# Altium PCB PCB1.PcbDoc
Units mm, origin at the board's own origin, x right, y up, seen from the top; angles counter-clockwise.
Board outline 25 x 65 mm, 2 copper layers (Top Layer, Bottom Layer); 15 components, 30 nets, 94 pads, 8 vias.
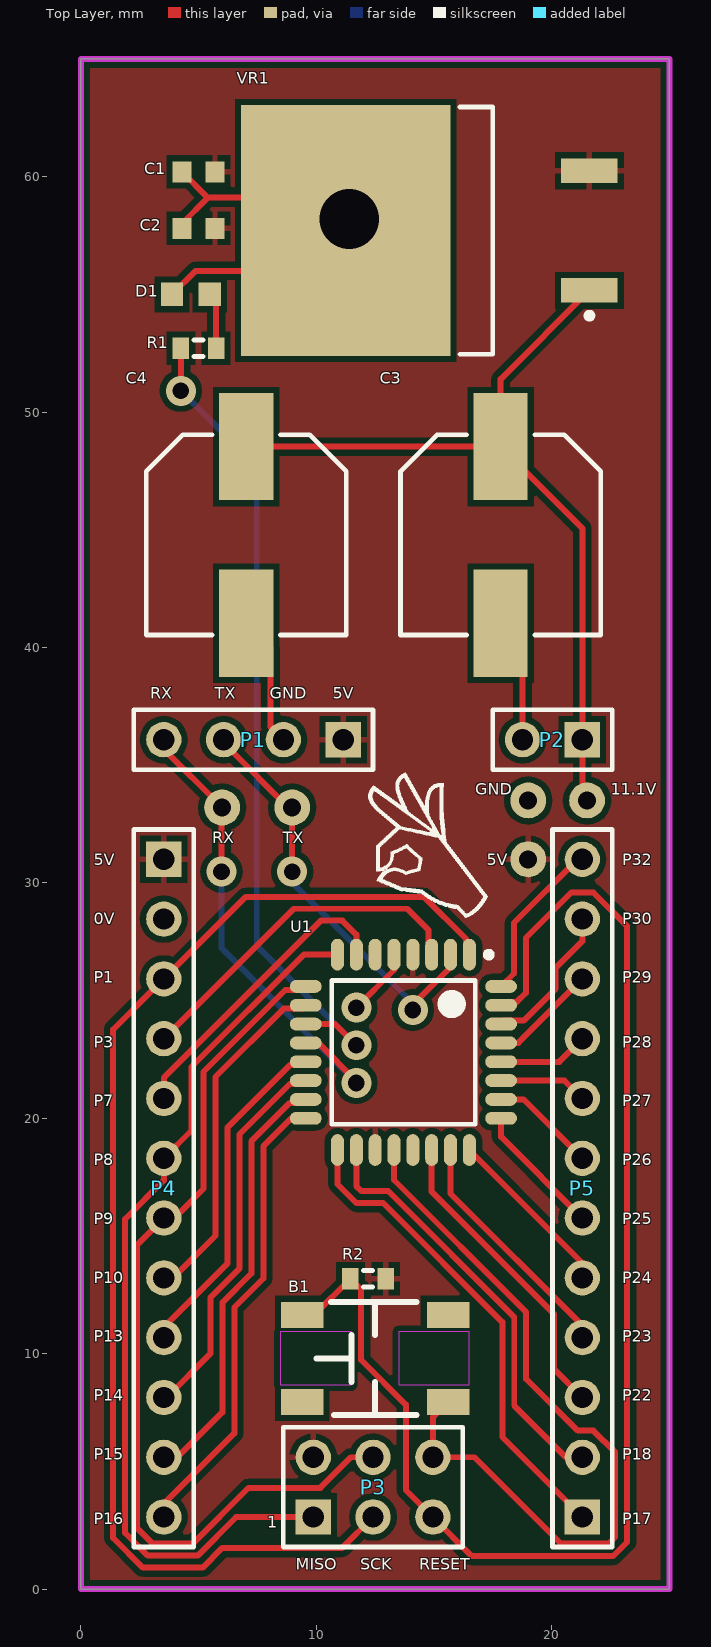
[diagram p0: Top Layer view]
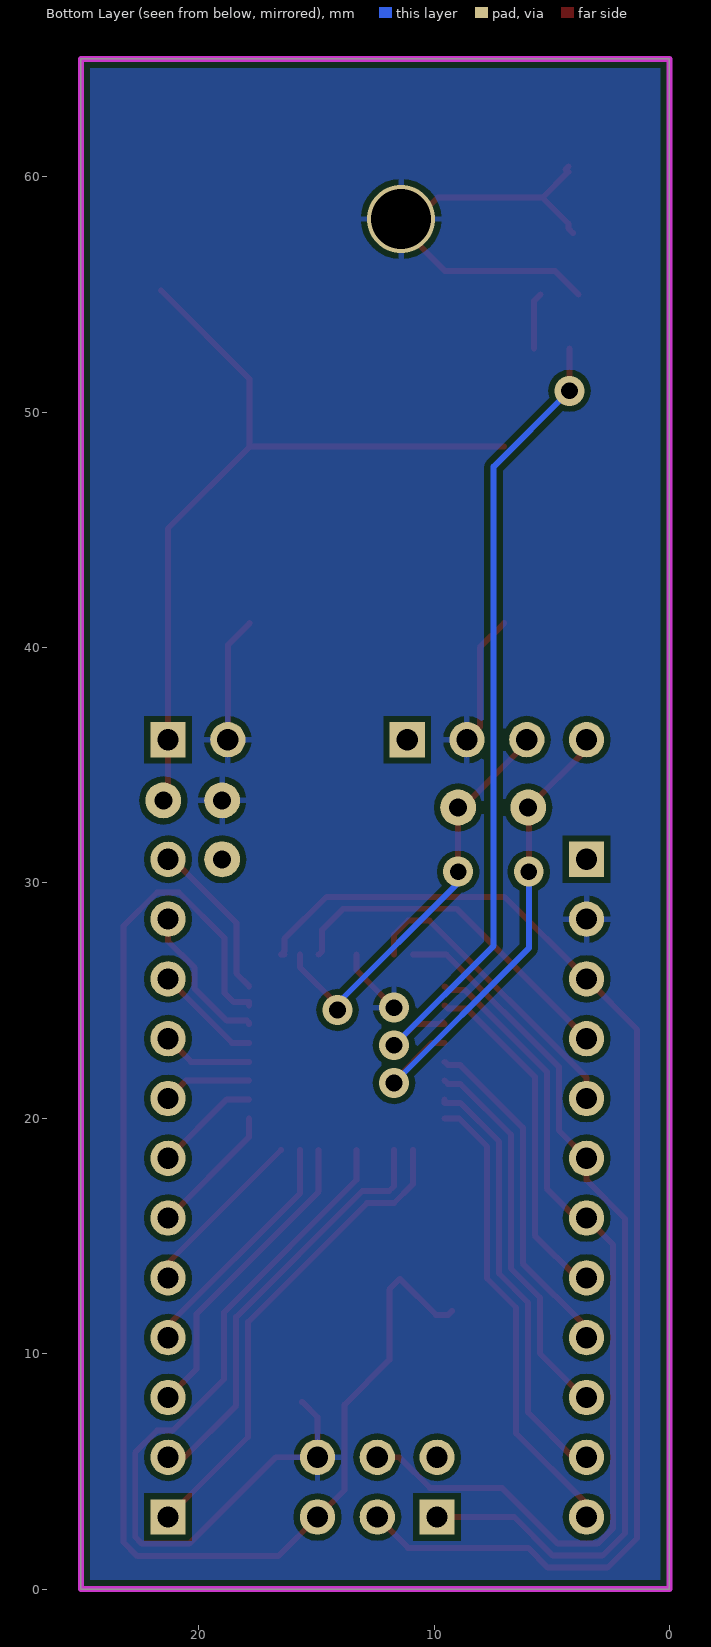
[diagram p1: Bottom Layer view, seen from below]

## Layer stack, top to bottom
Top Solder: solder mask 0.0102, Solder Resist, Dk 3.5
Top Layer: signal copper 0.0356
Dielectric 1: dielectric 0.32, FR-4, Dk 4.8
Bottom Layer: signal copper 0.0356
Bottom Solder: solder mask 0.0102, Solder Resist, Dk 3.5

## Board outline
0,0 0,65 25,65 25,0

## Design rules (kind name [scope] priority, off if disabled: settings)
Clearance [All] p1: gap=0.254
PolygonConnect [All] p1: connectstyle=Relief reliefconductorwidth=0.254 reliefentries=4 polygonreliefangle="90 Angle" airgapwidth=0.254
RoomDefinition Sheet3 [InComponentClass('Sheet3')] p1: confinementstyle=ConfineIn formatcopy=TRUE lockcomponents=FALSE outline 0,0 25,0 25,65 0,65
RoutingVias [All] p1: holewidth=0.711 width=1.27 viastyle="Through Hole" minholewidth=0.711 minwidth=1.27 maxholewidth=0.711 maxwidth=1.27
SolderMaskExpansion [All] p1: expansion=0.102
Width [All] p1: maxlimit=0.254 minlimit=0.254 preferedwidth=0.254
30 further rules are at their usual default settings.

## Classes and differential pairs
component class Sheet3: B1 C1 C2 C3 C4 D1 P2 P3 P4 P5 P? R1 R2 VR1

## Components (designator, comment, footprint, x,y, rotation, side; value= is the part's Value field where it differs from the comment)
B1 "Button" "SMT Tactile Button" 12.5,9.8 r180 top
C1 "Cap" 1608[0603] 4.996,60.2 r0 top
C2 "Cap" 1608[0603] 4.996,57.8 r0 top
C3 "Cap Pol2" CAPAE9983X105M 17.829,44.779 r270 top
C4 "Cap Pol2" CAPAE9983X105M 7.025,44.779 r270 top
D1 "LED1" L0603 4.671,55 r180 top
P1 "Header 4" HDR1X4 11.14,36.08 r180 top
P2 "Header 2" HDR1X2 21.3,36.08 r180 top
P3 "Header 3X2" HDR2X3 9.87,3.06 r0 top
P4 "Header 12" HDR1X12 3.52,31 r270 top
P5 "Header 12" HDR1X12 21.3,3.06 r90 top
R1 "Res3" J1-0603 4.996,52.709 r180 top
R2 "Res3" J1-0603 12.2,13.181 r0 top
U1 "ATmega32M1-AU" 32A_L 13.7,22.8 r270 top
VR1 "Volt Reg" D2PAK_N 14.8,57.709 r180 top

## Footprints (in the part's own frame and the unit in brackets; to place one, negate y for a bottom-side part, rotate by r counter-clockwise, add the part's x,y. Pads: shape width x height; smd on the part's side, far side on the other; paste and mask are expansions set on the pad)
32A_L [mm] "Thin QFP, 32-Leads, Body 7x7mm, Pitch 0.8mm, IPC High Density"
  oval 1.35x0.55 smd: 1(-4.15,2.8) 2(-4.15,2) 3(-4.15,1.2) 4(-4.15,0.4) 5(-4.15,-0.4) 6(-4.15,-1.2) 7(-4.15,-2) 8(-4.15,-2.8) 17(4.15,-2.8) 18(4.15,-2) 19(4.15,-1.2) 20(4.15,-0.4) 21(4.15,0.4) 22(4.15,1.2) 23(4.15,2) 24(4.15,2.8)
  oval 0.55x1.35 smd: 9(-2.8,-4.15) 10(-2,-4.15) 11(-1.2,-4.15) 12(-0.4,-4.15) 13(0.4,-4.15) 14(1.2,-4.15) 15(2,-4.15) 16(2.8,-4.15) 25(2.8,4.15) 26(2,4.15) 27(1.2,4.15) 28(0.4,4.15) 29(-0.4,4.15) 30(-1.2,4.15) 31(-2,4.15) 32(-2.8,4.15)
  silkscreen extent -4.27,-3.05 3.05,3.75, body extent -3.5,-3.5 3.5,3.5, height 1.2
1608[0603] [mm] "Chip Capacitor, Body 1.6x0.8mm, IPC High Density"
  rect 0.8x0.9 smd: 1(-0.7,0) 2(0.7,0)
  body extent -0.87,-0.48 0.87,0.48, height 1.3
CAPAE9983X105M [mm] "Aluminum Electrolytic Capacitor, Body 8.30x8.30x10.50mm, IPC Low Density"
  rect 4.55x2.3 smd: 1(-3.75,0) 2(3.75,0)
  silkscreen extent -4.25,-4.25 4.25,4.25, body extent -4.25,-4.25 4.25,4.25, height 10.5
D2PAK_N [mm] "D2-PAK, 4-Leads, Body 8.8x10.4mm, Pitch 2.54mm, Lead Span 15.1mm, IPC Medium Density"
  rect 2.4x1.05 smd: 1(-6.8,2.54) 3(-6.8,-2.54)
  rect 8.9x10.65 smd: 2(3.55,0)
  silkscreen extent -6.93,-5.25 -1.3,5.25, body extent -2.7,-5.28 6.3,5.28, height 4.69
HDR1X2 [mm] "Connector; Header; 2 Position"
  rect 1.5x1.5 hole 0.9: 1(0,0)
  round 1.5 hole 0.9: 2(2.54,0)
  silkscreen extent -1.27,-1.27 3.81,1.27
HDR1X4 [mm] "Connector; Header; 4 Position"
  rect 1.5x1.5 hole 0.9: 1(0,0)
  round 1.5 hole 0.9: 2(2.54,0) 3(5.08,0) 4(7.62,0)
  silkscreen extent -1.27,-1.27 8.89,1.27
HDR1X12 [mm] "Connector; Header; 12 Position"
  rect 1.5x1.5 hole 0.9: 1(0,0)
  round 1.5 hole 0.9: 2(2.54,0) 3(5.08,0) 4(7.62,0) 5(10.16,0) 6(12.7,0) 7(15.24,0) 8(17.78,0) 9(20.32,0) 10(22.86,0) 11(25.4,0) 12(27.94,0)
  silkscreen extent -1.27,-1.27 29.21,1.27
HDR2X3 [mm] "Connector; Header; 3x2 Position"
  rect 1.5x1.5 hole 0.9: 1(0,0)
  round 1.5 hole 0.9: 2(0,2.54) 3(2.54,0) 4(2.54,2.54) 5(5.08,0) 6(5.08,2.54)
  silkscreen extent -1.27,-1.27 6.35,3.81
J1-0603 [mm] "Chip Resistor, Body 1.6x0.8mm, IPC High Density"
  rect 0.7x0.9 smd: 1(-0.75,0) 2(0.75,0)
  silkscreen extent -0.2,-0.35 0.2,0.35, body extent -0.85,-0.48 0.85,0.48, height 0.9
L0603 [mm]
  rect 0.95x1 smd: 1(-0.8,0) 2(0.8,0)
"SMT Tactile Button" [mm]
  rect 1.8x1.1 smd: 1(3.1,1.85) 2(-3.1,1.85) 3(-3.1,-1.85) 4(3.1,-1.85)
  Top Layer keep-out region: 1.025,-1.125 4.025,-1.125 4.025,1.125 1.025,1.125
  Top Layer keep-out region: -4,-1.125 -1,-1.125 -1,1.125 -4,1.125
  silkscreen extent -1.75,-2.4 2.5,2.4

## Part data
B1: library part Switch
C1 C2: "Capacitor"
C3 C4: "Polarized Capacitor (Axial)"
D1: "Typical RED GaAs LED"
P1: "Header, 4-Pin"
P2: "Header, 2-Pin"
P3: "Header, 3-Pin, Dual row"
P4 P5: "Header, 12-Pin"
R1 R2: "Resistor"
U1: "8-bit AVR Microcontroller, 2.7-5.5V, 16MHz, 32KB Flash, 1KB EEPROM, 2KB SRAM, Industrial Grade (-40° to +85°C), 32-Pin TQFP"
VR1: "Voltage Regulator"

## Free pads (board coordinates)
  round 1.524 hole 0.762: 2(19,33.5) 3(19,31) 4(21.5,33.5) 5(6,33.2) 6(8.975,33.2)

## Via types
v1: diameter 1.27, hole 0.711, Top Layer to Bottom Layer, 7 vias
v2: diameter 2.896, hole 2.54, Top Layer to Bottom Layer, 1 vias

## Nets (pads, with @x,y where several pads share a name; then routed paths per layer and width w, separated by ;. In a path a pad name is that pad's centre, name@x,y a point inside that pad or via, vN(x,y) a via of type N, cw(c..) or ccw(c..) an arc to the next point about the centre after c; other vN are vias at no path point)
3S(11.1V): C3.1 C4.1 P2.1 pad.4 VR1.1 | length 35.7
  Top Layer w0.254: C4.1 C3.1 ; pad.4 21.3,33.45 P2.1 21.3,45.059 C3.1 ; VR1.1 17.829,51.398 C3.1
5V: C1.2 C2.2 P1.1 P3.2 P4.1 pad.3 R2.2 U1.4 U1.19 VR1.3
GND: B1.2 C1.1 C2.1 C3.2 C4.2 D1.2 P1.2 P2.2 P3.6 P4.2 pad.2 U1.5 U1.20 VR1.2 | length 65.2
  Top Layer w0.254: D1.2 4.871,56 9.541,56 VR1.2 9.854,59.104 5.391,59.104 ; C2.1@4.1,57.604 C2.1 4.296,58.008 5.391,59.104 ; C1.1 5.391,59.104 ; C1.1@4.296,60.421 C1.1@4.406,60.311 ; C4.2 8.05,40.004 8.05,36.63 P1.2 ; v1(11.7,24.7) 13.3,26.3 U1.5 ; U1.20 13.3,17.376 18.916,11.76 18.916,8.925 21.11,6.731 21.768,6.731 22.692,5.807 22.692,2.21 22.411,1.929 20.392,1.929 16.721,5.6 P3.6 14.95,7.3 B1.2 ; C3.2 18.76,40.098 P2.2
  other v2: 11.4,58.2
MISO: P3.1 P4.6 U1.8 | length 38.2
  Top Layer w0.254: P3.1 6.597,3.06 4.958,1.421 2.841,1.421 1.881,2.381 1.881,15.72 3.52,17.359 P4.6 4.7,19.48 4.7,22.182 9.468,26.95 U1.8
MOSI: P3.4 P4.7 U1.9 | length 38.5
  Top Layer w0.254: U1.9 9.406,25.456 8.693,25.456 5.208,21.971 5.208,17.008 3.96,15.76 P4.7 2.389,14.629 2.389,2.592 3.052,1.929 4.747,1.929 7.118,4.3 10.169,4.3 11.469,5.6 P3.4
NetD1_1: D1.1 R1.1 | length 2.4
  Top Layer w0.254: D1.1 5.746,54.725 R1.1
P1: P3.3 P4.3 U1.1 | length 53
  Top Layer w0.254: P3.3 11.1,1.75 6.005,1.75 5.168,0.913 2.631,0.913 1.373,2.171 1.373,23.773 P4.3 7.008,29.408 14.57,29.408 16.356,27.622 16.356,27.094 U1.1 U1.1@16.356,26.95
P3: P4.4 U1.3 | length 15
  Top Layer w0.254: P4.4 9.04,28.9 13.862,28.9 14.756,28.006 14.756,27.094 U1.3
P7: P4.5 U1.7 | length 12.9
  Top Layer w0.254: P4.5 3.52,21.72 10.192,28.392 11.108,28.392 11.7,27.8 U1.7
P10: P4.8 U1.10 | length 14.8
  Top Layer w0.254: P4.8 3.92,13.22 5.716,15.016 5.716,21.761 8.611,24.656 9.406,24.656 U1.10
P13: P4.9 U1.13 | length 14.5
  Top Layer w0.254: P4.9 3.52,11.12 6.224,13.824 6.224,19.602 8.878,22.256 9.406,22.256 U1.13
P14: P4.10 U1.14 | length 16.3
  Top Layer w0.254: P4.10 3.64,8.14 5.5,10 5.5,12.382 6.732,13.614 6.732,19.31 8.878,21.456 9.406,21.456 U1.14
P15: P4.11 U1.15 | length 18.4
  Top Layer w0.254: P4.11 4.1,5.6 6.008,7.508 6.008,12.171 7.24,13.403 7.24,19.018 8.878,20.656 9.55,20.656 U1.15
P16: P4.12 U1.16 | length 19.8
  Top Layer w0.254: P4.12 3.52,3.62 6.516,6.616 6.516,11.961 7.748,13.193 7.748,18.807 8.941,20 U1.16
P17: P5.1 U1.17 | length 20.6
  Top Layer w0.254: U1.17 10.9,17.2 11.7,16.4 12.839,16.4 17.9,11.339 17.9,6.46 P5.1
P18: P5.2 U1.18 | length 18.1
  Top Layer w0.254: U1.18 11.7,17.118 11.91,16.908 13.049,16.908 18.408,11.549 18.408,7.792 20.6,5.6 P5.2
P22: P5.3 U1.22 | length 13.2
  Top Layer w0.254: U1.22 14.9,16.882 20.1,11.682 20.1,9.34 P5.3
P23: P5.4 U1.23 | length 10.8
  Top Layer w0.254: U1.23 15.7,16.8 21.3,11.2 P5.4 P5.4@20.775,10.68
P24: P5.5 U1.24 | length 7.8
  Top Layer w0.254: U1.24 21.3,13.85 P5.5 P5.5@20.93,13.22
P25: P5.6 U1.25 | length 5.7
  Top Layer w0.254: U1.25 17.85,19.21 P5.6
P26: P5.7 U1.26 | length 4.5
  Top Layer w0.254: U1.26 18.8,20.8 P5.7
P27: P5.8 U1.27 | length 3.8
  Top Layer w0.254: U1.27 20.54,21.6 P5.8
P28: P5.9 U1.28 | length 3.9
  Top Layer w0.254: U1.28 20.32,22.4 P5.9
P29: P5.10 U1.29 | length 4.6
  Top Layer w0.254: U1.29 18.58,23.2 P5.10
P30: P5.11 U1.30 | length 6.4
  Top Layer w0.254: U1.30 17.85,24.05 17.944,24.144 18.806,24.144 20.169,25.507 20.169,26.388 21.3,27.519 P5.11
P32: P5.12 U1.32 | length 6.9
  Top Layer w0.254: U1.32 18.398,26.148 18.398,28.298 21.1,31 P5.12
PULSE: R1.2 U1.11 | length 35.4
  Top Layer w0.254: v1(4.246,50.9) R1.2 ; U1.11@9.65,24.1 U1.11 10.8,24 v1(11.7,23.1)
  Bottom Layer w0.254: v1(4.246,50.9) 7.469,47.677 7.469,27.331 v1(11.7,23.1)
RESET: B1.4 P3.5 R2.1 U1.31 | length 59.2
  Top Layer w0.254: B1.4@9.244,11.806 B1.4 9.919,11.65 R2.1 11.9,12.731 11.9,9.736 13.8,7.836 13.8,4.21 P3.5 16.61,1.4 22.6,1.4 23.2,2 23.2,28.159 21.768,29.591 20.832,29.591 18.906,27.665 18.906,25.328 18.522,24.944 17.85,24.944 U1.31
RXD: P1.4 pad.5 U1.12 | length 21.4
  Top Layer w0.254: P1.4 3.52,35.68 pad.5 5.975,33.175 v1(5.975,30.475) v1@5.975,29.95 ; U1.12 10.078,23.2 11.7,21.578 v1(11.7,21.5)
  Bottom Layer w0.254: v1(5.975,30.475) 5.975,27.225 v1(11.7,21.5)
TXD: P1.3 pad.6 U1.2 | length 17.8
  Top Layer w0.254: P1.3 6.06,35.94 8.975,33.025 v1(8.975,30.475) ; v1(14.1,24.6) 14.1,24.822 15.7,26.422 U1.2
  Bottom Layer w0.254: v1(8.975,30.475) 8.975,30 14.1,24.875 v1(14.1,24.6)
pads on no net: B1.1 B1.3 U1.6 U1.21

## Polygon pours and split planes (outlines as drawn)
5V on Top Layer "5V_L01_P000" (solid, remove dead copper, pour order 0): -3.8,69 -7.2,65.6 -7.2,-1.1 29.7,-1.1 30.8,0 30.9,0.1 30.9,70.4
GND on Bottom Layer "GND_L02_P002" (solid, remove dead copper, pour order 2): -4.7,72.3 -6.4,70.6 -6.4,-1.3 39.1,-1.3 41.3,-3.5 35.5,2.3 35.5,71.5

## Keep-outs
Keep-Out Layer:
  the board outline again, w0.254

## Silkscreen, mask and mechanical layers (free items; w line width, h text height)
Top Overlay:
  region: 1507 vertices and 6 holes, not listed, extent 12.21,28.518 17.28,34.673
  text "RX" at 2.95,37.825 h0.5
  text "TX" at 5.675,37.825 h0.5
  text "GND" at 8.025,37.825 h0.5
  text "5V" at 10.7,37.825 h0.5
  text "GND" at 16.75,33.75 h0.5
  text "11.1V" at 22.5,33.75 h0.5
  text "RX" at 5.575,31.675 h0.5
  text "TX" at 8.575,31.675 h0.5
  text "5V" at 0.544,30.75 h0.5
  text "5V" at 17.25,30.75 h0.5
  text "P32" at 23,30.75 h0.5
  text "0V" at 0.544,28.25 h0.5
  text "P30" at 23,28.25 h0.5
  text "P1" at 0.544,25.75 h0.5
  text "P29" at 23,25.75 h0.5
  text "P3" at 0.544,23 h0.5
  text "P28" at 23,23 h0.5
  text "P7" at 0.544,20.5 h0.5
  text "P27" at 23,20.5 h0.5
  text "P8" at 0.544,18 h0.5
  text "P26" at 23,18 h0.5
  text "P9" at 0.544,15.5 h0.5
  text "P25" at 23,15.5 h0.5
  text "P10" at 0.544,13 h0.5
  text "P24" at 23,13 h0.5
  text "P13" at 0.544,10.5 h0.5
  text "P23" at 23,10.5 h0.5
  text "P14" at 0.544,8 h0.5
  text "P22" at 23,8 h0.5
  text "P15" at 0.544,5.5 h0.5
  text "P18" at 23,5.5 h0.5
  text "P16" at 0.544,2.75 h0.5
  text "P17" at 23,2.75 h0.5
  text "MISO" at 9.125,0.825 h0.5
  text "SCK" at 11.875,0.825 h0.5
  text "RESET" at 14.375,0.825 h0.5

## Text inside footprints (layer, text, board x,y; h text height)
P3: Top Overlay "1" at 7.925,2.6 h0.5